# Altium PCB Buck Converter.PcbDoc
Units mil, origin at the board's own origin, x right, y up, seen from the top; angles counter-clockwise.
Board outline 2261.35 x 1643.57 mil, 4 copper layers (Top Layer, L2 - GND, L3 - POWER, Bottom Layer), stack 23.756 mil thick; 39 components, 21 nets, 106 pads, 117 vias.
Unrouted connection lines stored in the file: 7.
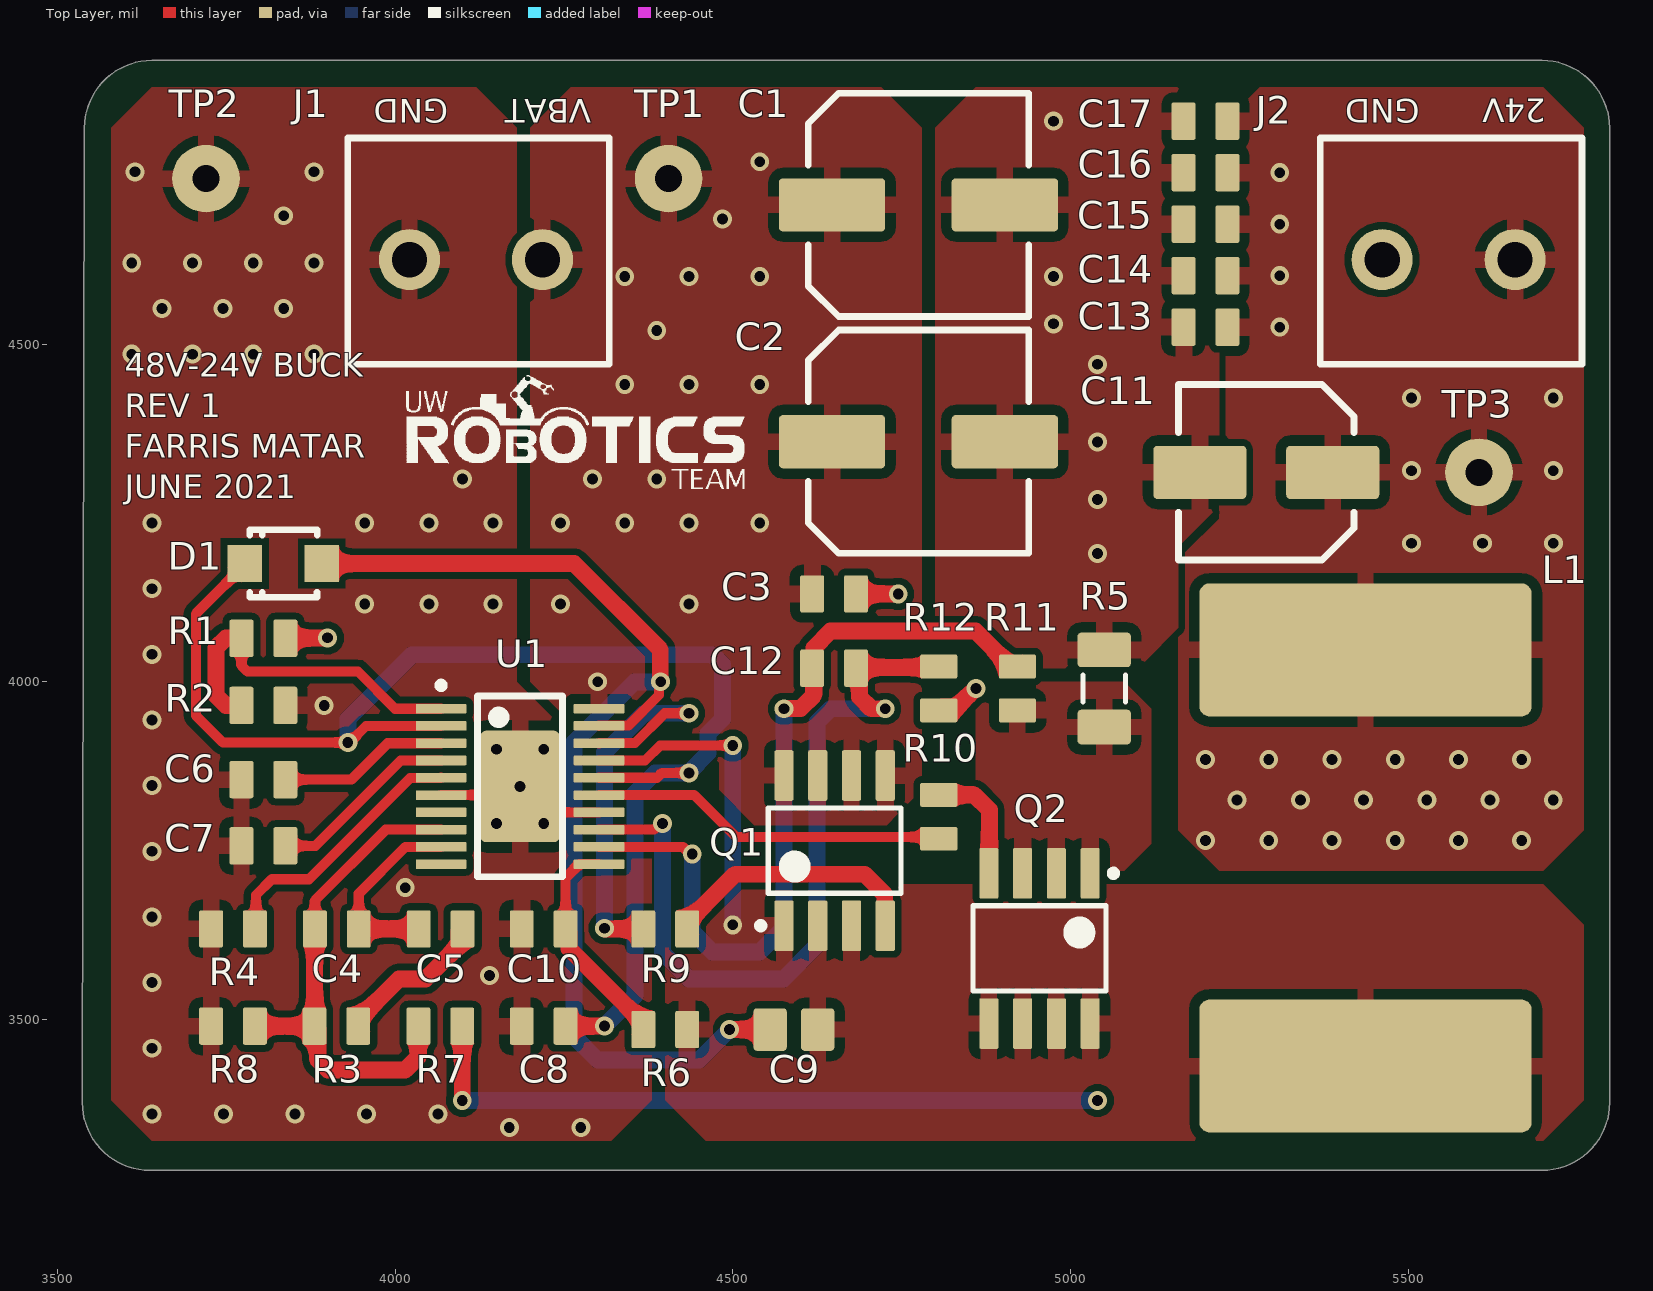
[diagram p0: Top Layer view]
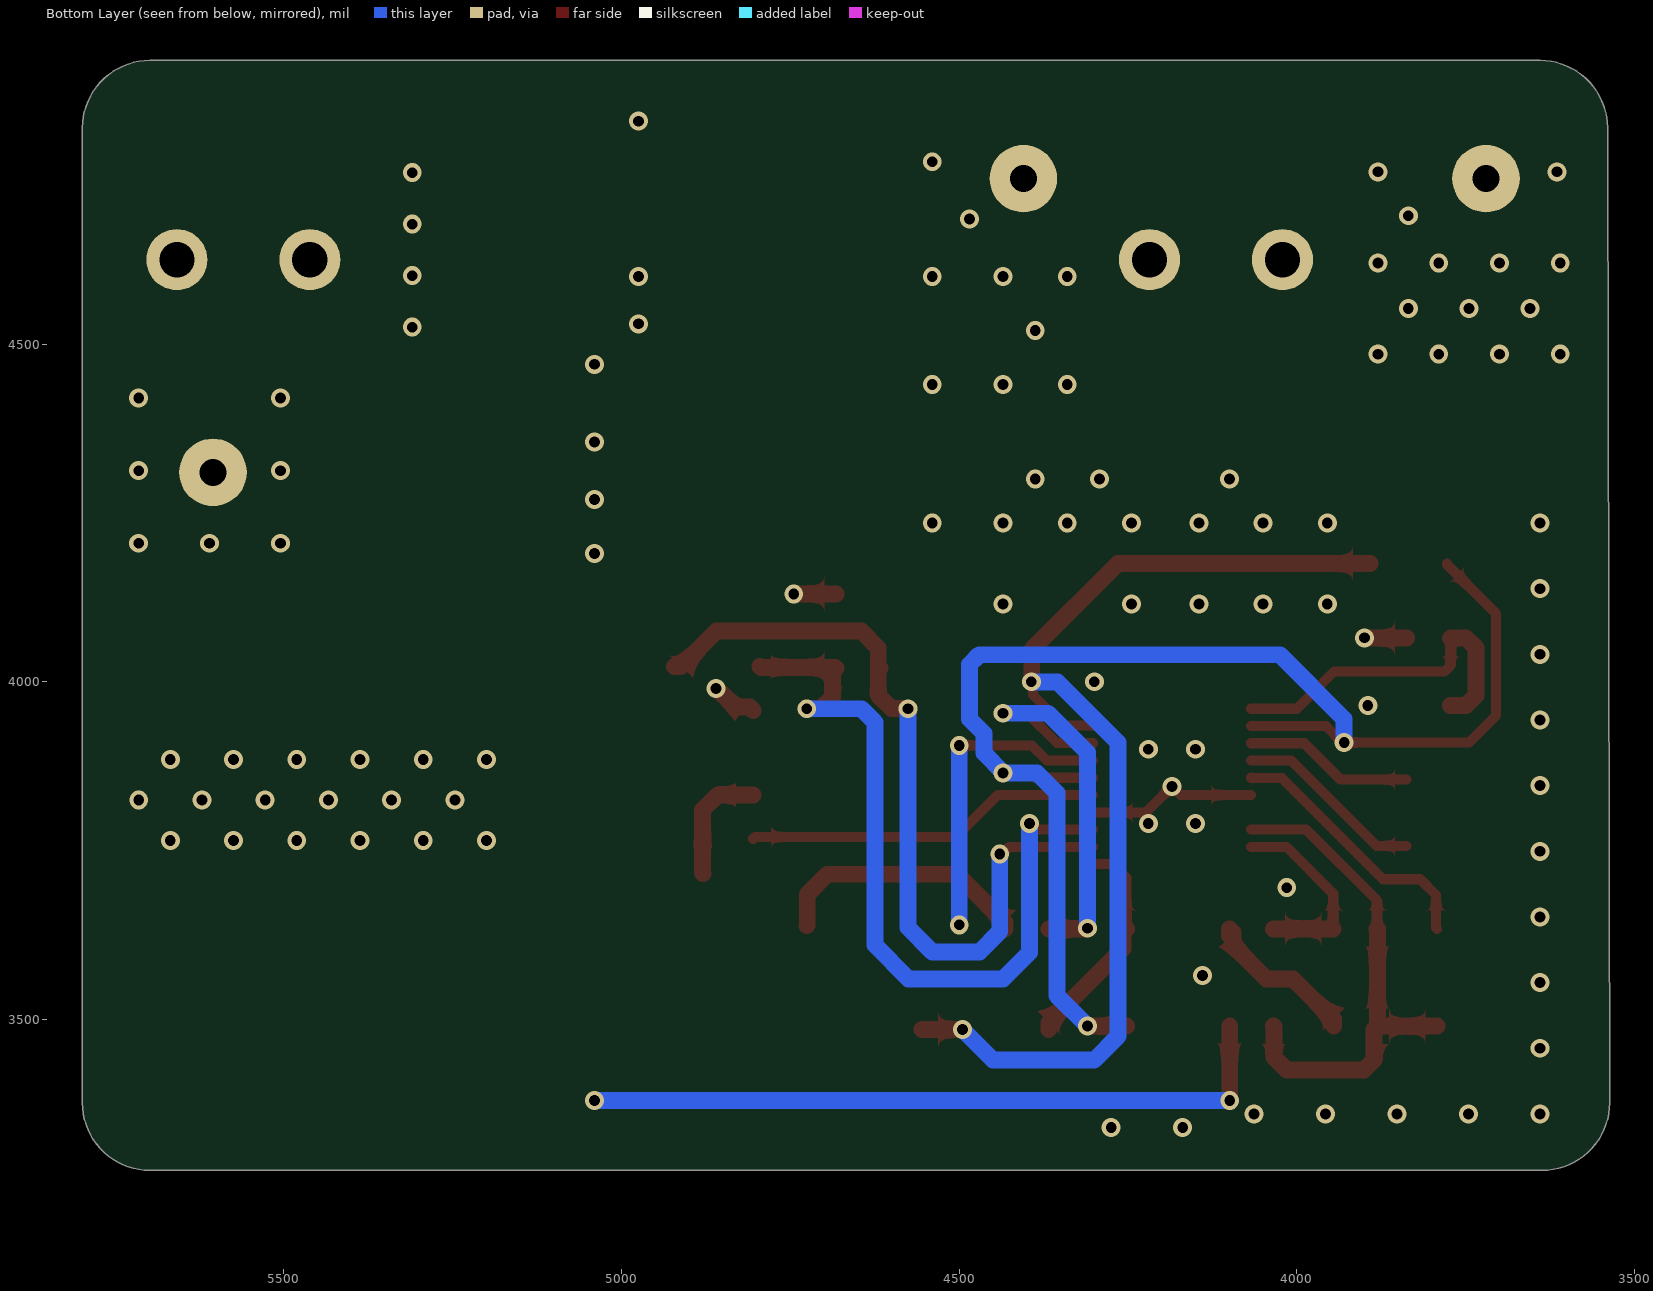
[diagram p1: Bottom Layer view, seen from below]
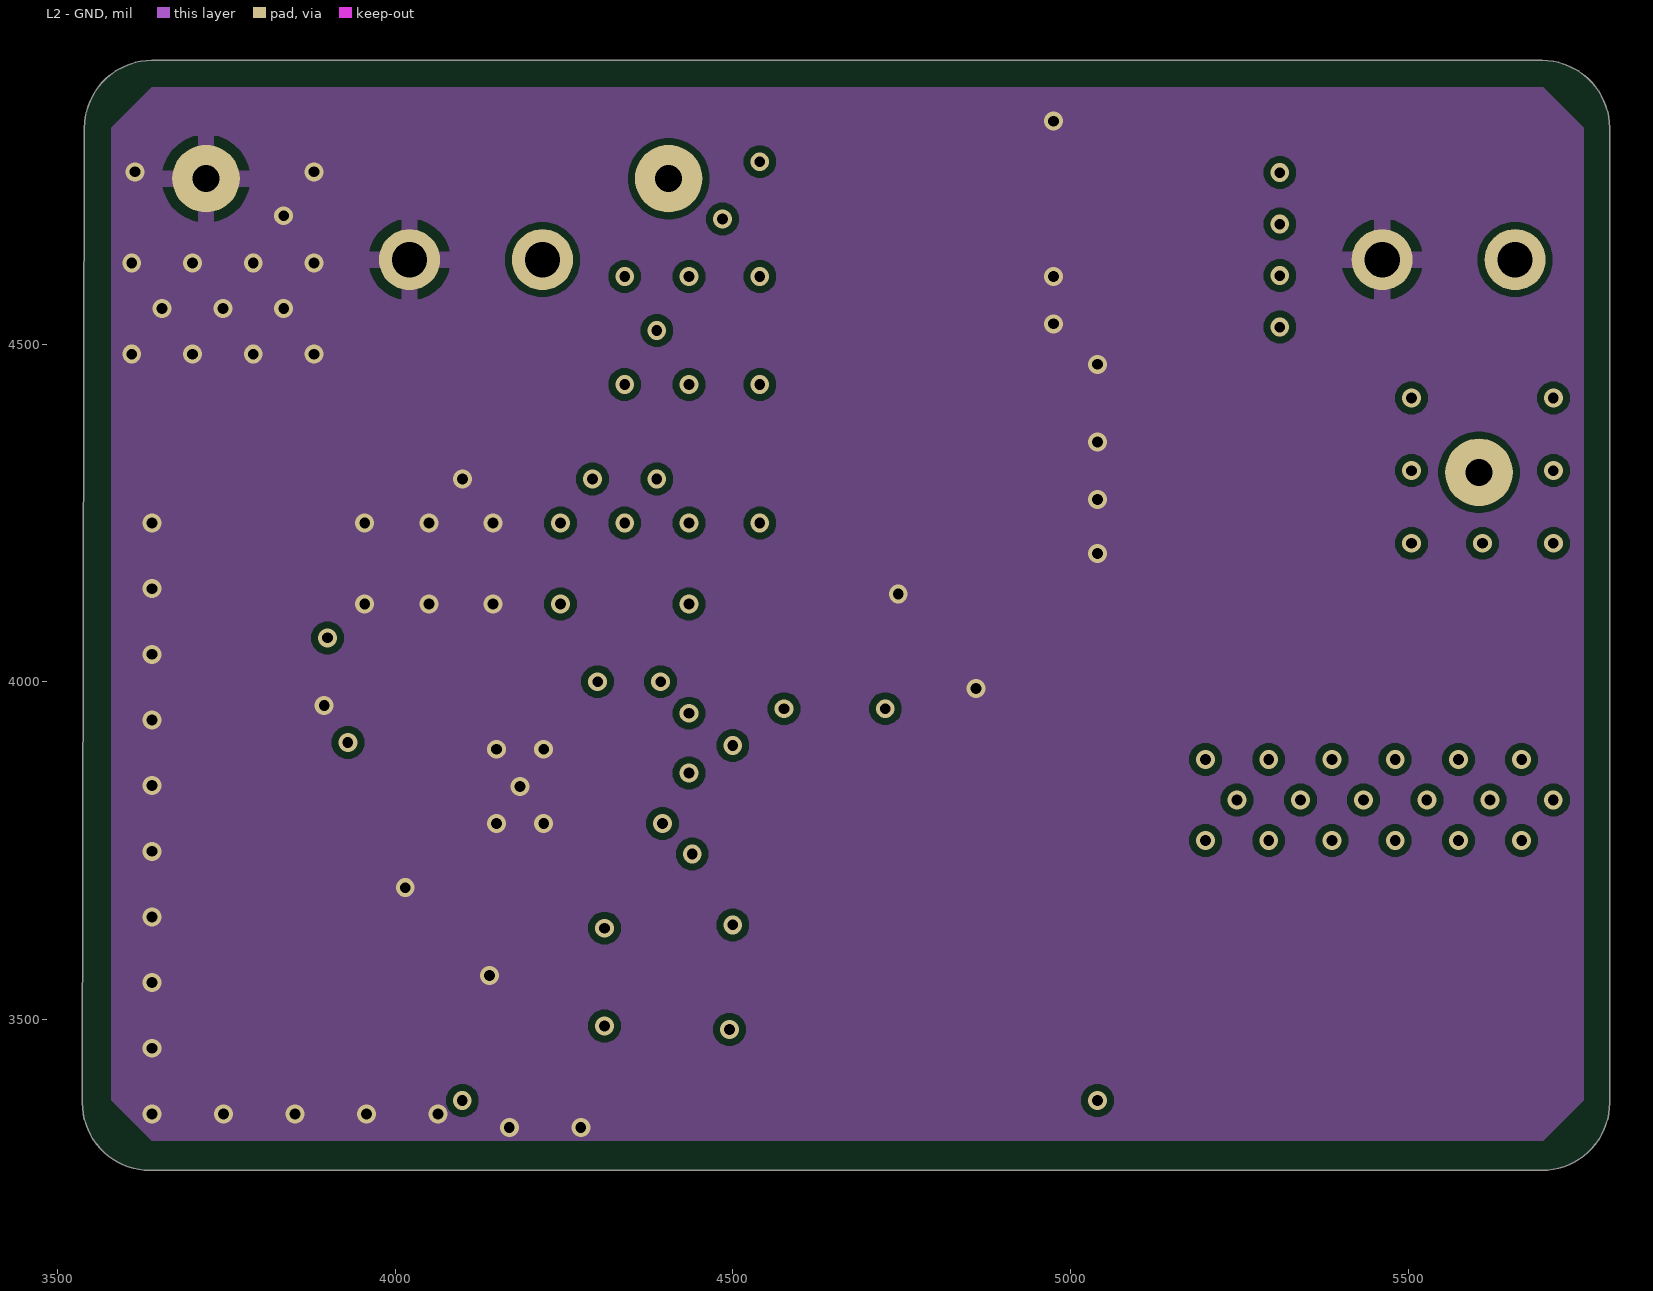
[diagram p2: L2 - GND]
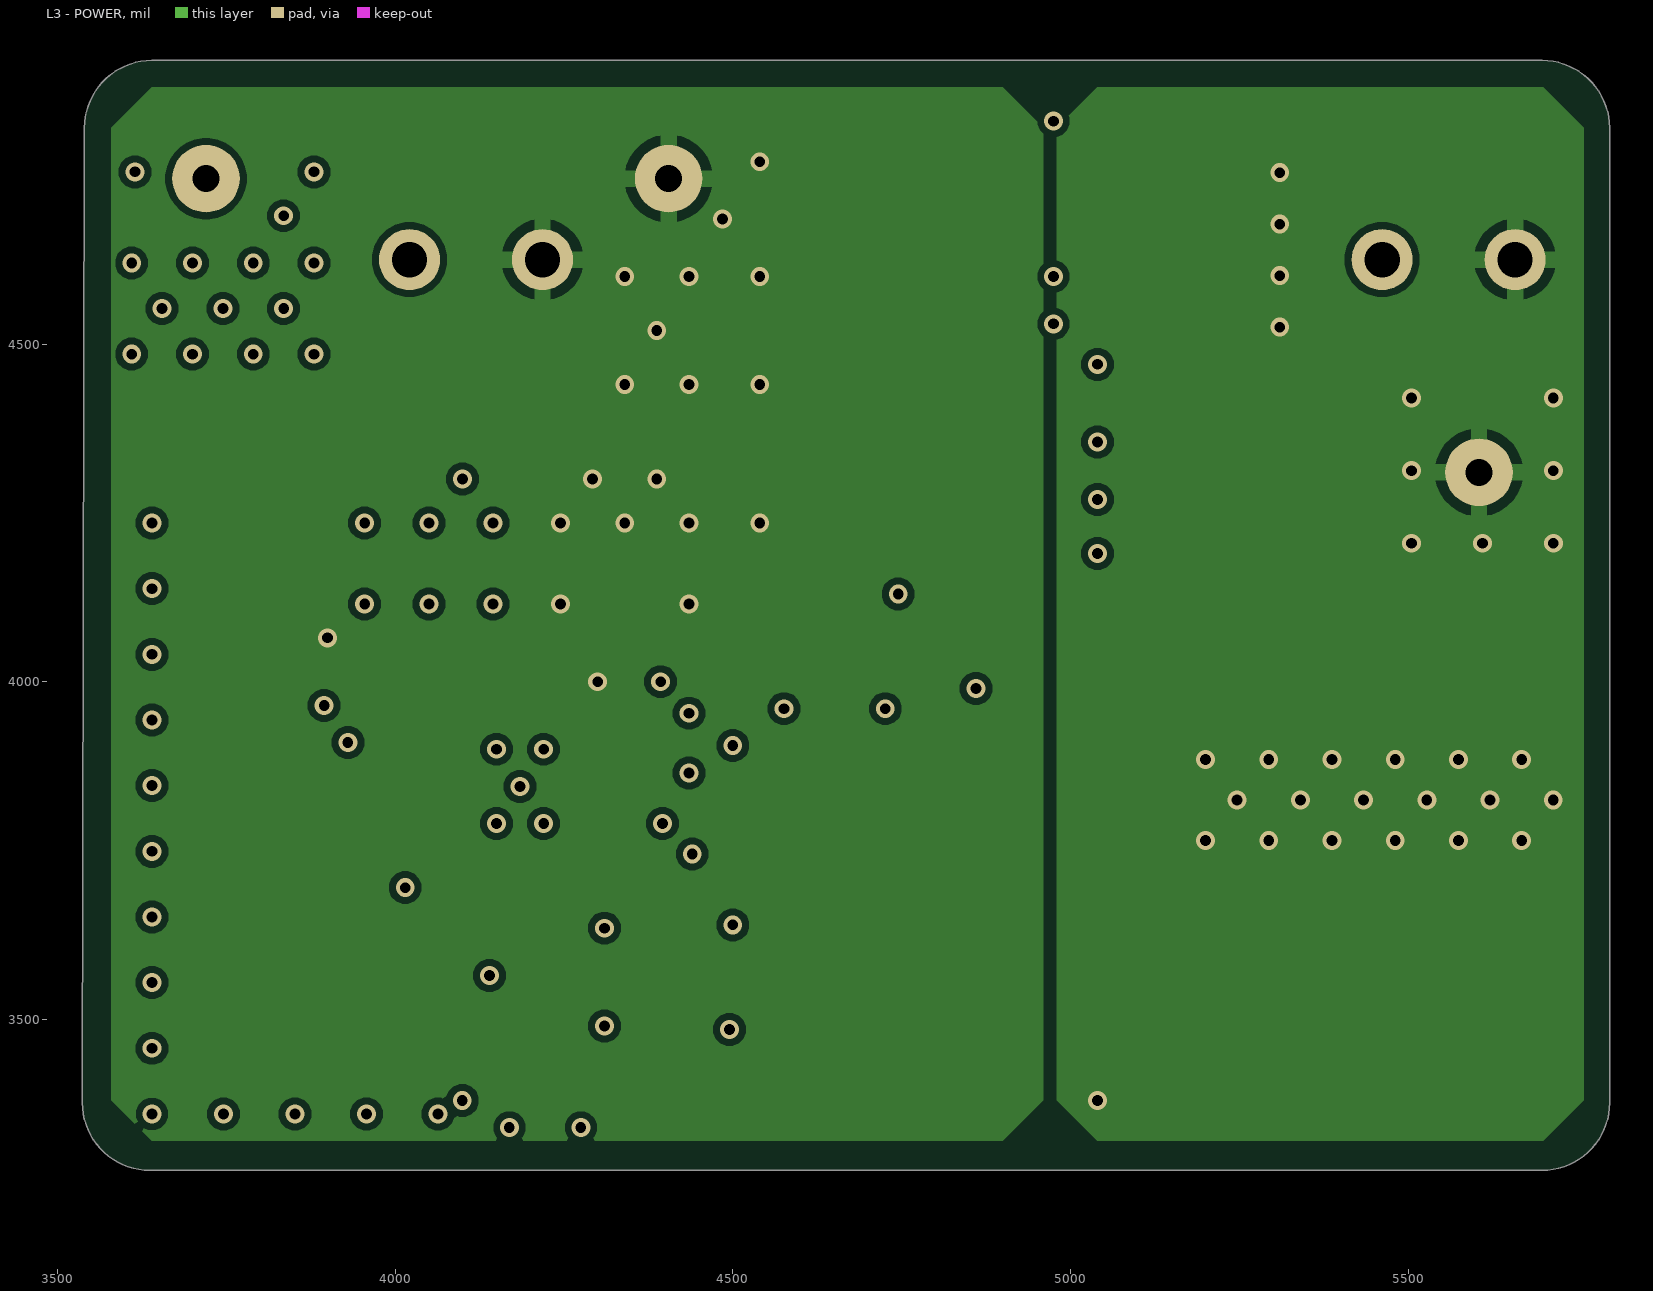
[diagram p3: L3 - POWER]
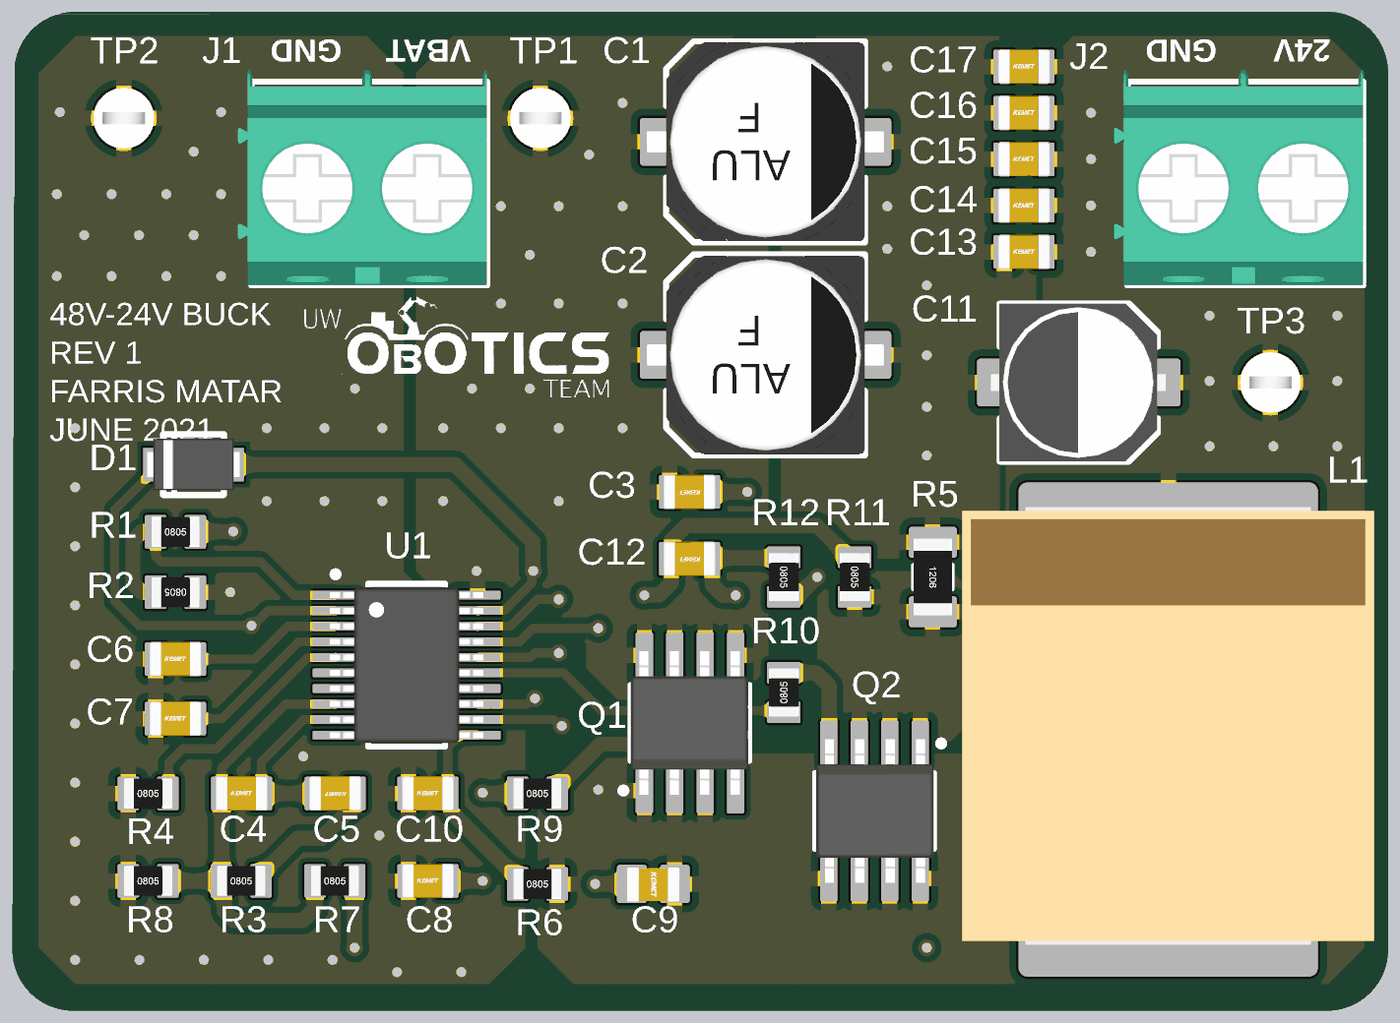
[diagram p4: 3D render of the assembled board from above, using the file's embedded part models]

## Layer stack, top to bottom
Top Solder: solder mask 0.4, Solder Resist, Dk 3.5
Top Layer: signal copper 1.4
Dielectric 2: prepreg 2.8, PP-006, Dk 4.1
L2 - GND: signal copper 1.378
Dielectric 1: dielectric 12.6, FR-4, Dk 4.8
L3 - POWER: signal copper 1.378
Dielectric 3: prepreg 2.8, PP-006, Dk 4.1
Bottom Layer: signal copper 1.4
Bottom Solder: solder mask 0.4, Solder Resist, Dk 3.5

## Board outline
3537,3376.43 ccw(c3637,3376.43) 3637,3276.43 3820.01,3276.43 5698.35,3276.43 ccw(c5698.35,3376.43) 5798.35,3376.43 5798.35,4820 ccw(c5698.35,4820) 5698.35,4920 3640,4920 ccw(c3640,4820) 3540,4820 3540,4800

## Design rules (kind name [scope] priority, off if disabled: settings)
Clearance [All] p1: gap=10 ignorepadtopadclearanceinfootprint=FALSE except(0: Arc-Hole Track-Hole SMDPad-Hole THPad-Hole Via-Hole Fill-Hole Poly-Hole Region-Hole Text-Hole)
PolygonConnect [All] p1: thpad.connectstyle=Relief thpad.reliefconductorwidth=25 thpad.reliefentries=4 thpad.polygonreliefangle="90 Angle" thpad.airgapwidth=15 smdpad.connectstyle=Relief smdpad.reliefconductorwidth=25 smdpad.reliefentries=4 smdpad.polygonreliefangle="90 Angle" smdpad.airgapwidth=15 via.connectstyle=Direct via.reliefconductorwidth=10 via.reliefentries=4 via.polygonreliefangle="90 Angle" via.airgapwidth=10
RoomDefinition "Buck Converter" [InComponentClass('Buck Converter')] p1: confinementstyle=ConfineIn formatcopy=TRUE lockcomponents=FALSE outline 2930,2010 5960,2010 5960,5000 2930,5000
RoutingVias [All] p1: holewidth=28 width=50 viastyle="Through Hole" minholewidth=28 minwidth=50 maxholewidth=28 maxwidth=50
SolderMaskExpansion [All] p1: expansion=4 istentingtop=FALSE
Width [All] p1: maxlimit=50 minlimit=10 preferedwidth=10 midlayer1_maxwidth=10 midlayer2_maxwidth=10 minimp=50.000000 maximp=50.000000 favimp=50.000000
30 further rules are at their usual default settings.

## Components (designator, comment, footprint, x,y, rotation, side; value= is the part's Value field where it differs from the comment)
C1 "CAP_22uF_80V_ALUM" RADIAL_PANASONIC_F 4775,4706.14 r270 top value=22µF
C2 "CAP_22uF_80V_ALUM" RADIAL_PANASONIC_F 4775,4355.42 r270 top value=22µF
C3 "CAP_0.1uF_100V_0805" CAP0805 4650,4130 r180 top value=0.1µF
C4 "CAP_150pF_16V_0805" CAP0805 3913.75,3634 r0 top value=150pF
C5 "CAP_330pF_50V_0805" CAP0805 4067.5,3634 r180 top value=330pF
C6 "CAP_0.47uF_25V_0805" CAP0805 3805,3855 r0 top value=0.47µF
C7 "CAP_0.015uF_50V_0805" CAP0805 3805,3757 r0 top value=0.015µF
C8 "CAP_0.47uF_25V_0805" CAP0805 4220,3490 r0 top value=0.47µF
C9 "CAP_0.22uF_100V_0805" CAP2012 4590.58,3485 r180 top value=0.22μF
C10 "CAP_820pF_50V_0805" CAP0805 4220,3634 r0 top value=820pF
C11 "CAP_100uF_35V_ALUM" RADIAL_CORNELL_D 5290,4310.01 r90 top value=100µF
C12 "CAP_NU_0805" CAP0805 4650,4020 r180 top value=NU
C13 "CAP_NU_0805" CAP0805 5200,4525 r0 top value=NU
C14 "CAP_NU_0805" CAP0805 5200,4601.25 r0 top value=NU
C15 "CAP_NU_0805" CAP0805 5200,4677.5 r0 top value=NU
C16 "CAP_NU_0805" CAP0805 5200,4753.75 r0 top value=NU
C17 "CAP_NU_0805" CAP0805 5200,4830 r0 top value=NU
D1 "DIO_SCHOTTKY_100V_150mA" SOD-123_FLAT 3834.61,4175 r0 top
J1 "CON_2POS_SCREW_TERM" 1935161 4119.8,4625 r180 top
J2 "CON_2POS_SCREW_TERM" 1935161 5560,4625 r180 top
L1 "IND_33uH_12.0A" IND_PULSE_PA4344 5436.98,3745 r270 top
Q1 "NMOS_100V_10.3A" 8-SOIC_NMOS 4650,3750 r90 top
Q2 "NMOS_100V_10.3A" 8-SOIC_NMOS 4955,3605 r270 top
R1 "RES_54.9kΩ_0805_1%" RES0805 3805,4064.34 r0 top value=54.9kΩ
R2 "RES_2.32kΩ_0805_1%" RES0805 3805,3965 r180 top value=2.32kΩ
R3 "RES_133kΩ_0805_1%" RES0805 3913.01,3490 r0 top value=133kΩ
R4 "RES_12.1kΩ_0805_1%" RES0805 3760,3634 r0 top value=12.1kΩ
R5 "RES_0.015Ω_1206_1%" RES1206 5050,3990 r270 top value=0.015Ω
R6 "RES_267kΩ_0805_1%" RES0805 4400,3485 r0 top value=267kΩ
R7 "RES_34.8kΩ_0805_1%" RES0805 4067.01,3490 r0 top value=34.8kΩ
R8 "RES_1.2kΩ_0805" RES0805 3760,3490 r0 top value=1.2kΩ
R9 "RES_0Ω_0805" RES0805 4400,3634 r0 top value=0Ω
R10 "RES_0Ω_0805" RES0805 4805,3800 r90 top value=0Ω
R11 "RES_0Ω_0805" RES0805 4921.59,3990 r270 top value=0Ω
R12 "RES_0Ω_0805" RES0805 4805,3990 r270 top value=0Ω
TP1 "TESTPOINT_LOOP" TESTPOINT_LOOP 4405,4745 r0 top
TP2 "TESTPOINT_LOOP" TESTPOINT_LOOP 3720,4745 r0 top
TP3 "TESTPOINT_LOOP" TESTPOINT_LOOP 5605,4310 r0 top
U1 "BUCK_LM5117PWP" HTSSOP 4185,3845 r0 top

## Footprints (in the part's own frame and the unit in brackets; to place one, negate y for a bottom-side part, rotate by r counter-clockwise, add the part's x,y. Pads: shape width x height; smd on the part's side, far side on the other; paste and mask are expansions set on the pad)
8-SOIC_NMOS [mm]
  rrect15% 1.9x0.72 smd: 1(-2.827,-1.926) 2(-2.827,-0.656) 2(-2.827,0.614) 2(-2.827,1.884) 3(2.823,-1.926) 3(2.823,-0.656) 3(2.823,0.614) 3(2.823,1.884)
  silkscreen extent -2.95,-2.52 1.6,2.88, body extent -3,-2.45 3,2.45, height 1.63
1935161 [mm] "TERM BLK 2POS SIDE ENTRY 5MM PCB"
  round 2.3 hole 1.325: 1(-2.5,0) 2(2.5,0)
  silkscreen extent -5.01,-4.57 4.83,3.94, body extent -5.01,-5.06 5.39,3.94, height 11.41
CAP0805 [mm] "Chip Capacitor, Body 2.0x1.2mm, Height 0.45mm, IPC Medium Density"
  rrect15% 0.9x1.4 smd: 1(-0.825,0) 2(0.825,0)
  body extent -1.1,-0.73 1.1,0.73, height 1.39
CAP2012 [mm]
  rrect20% 1.25x1.6 smd: 1(-0.895,0) 2(0.895,0)
  body extent -1.1,-0.7 1.1,0.75, height 1.41
HTSSOP [mm]
  rrect15% 1.9x0.36 smd: 1(-2.97,2.925) 2(-2.97,2.275) 3(-2.97,1.625) 4(-2.97,0.975) 5(-2.97,0.325) 6(-2.97,-0.325) 7(-2.97,-0.975) 8(-2.97,-1.625) 9(-2.97,-2.275) 10(-2.97,-2.925) 11(2.97,-2.925) 12(2.97,-2.275) 13(2.97,-1.625) 14(2.97,-0.975) 15(2.97,-0.325) 16(2.97,0.325) 17(2.97,0.975) 18(2.97,1.625) 19(2.97,2.275) 20(2.97,2.925)
  rrect15% 3x4.2 smd: 21(0,0)
  silkscreen extent -3.09,-3.4 1.6,3.92, body extent -3.2,-3.25 3.2,3.25, height 1.1
IND_PULSE_PA4344 [mm]
  rrect15% 5x12.5 smd: 1(-7.675,0) 2(7.975,0)
  body extent -9.14,-8.6 9.14,8.6, height 7.06
RADIAL_CORNELL_D [mm] "Size D radial surface mount capacitor"
  rrect15% 2x3.5 smd: 1(0,-2.5) 2(0,2.5)
  silkscreen extent -3.3,-3.3 3.3,3.3, body extent -3.3,-3.62 3.3,3.67, height 5.9
RADIAL_PANASONIC_F [mm]
  rrect15% 2x4 smd: 1(0,-3.25) 2(0,3.25)
  silkscreen extent -4.2,-4.15 4.2,4.15, body extent -4.15,-4.95 4.15,4.95, height 10.2
RES0805 [mm] "Chip Resistor, 2-Leads, Body 2.00x1.25mm, IPC High Density"
  rrect15% 0.9x1.4 smd: 1(-0.825,0) 2(0.825,0)
  body extent -1,-0.62 1,0.63, height 0.61
RES1206 [mm] "Chip Resistor, Body 3.2x1.6mm, IPC Medium Density"
  rrect20% 1.3x2 smd: 1(-1.45,0) 2(1.45,0)
  silkscreen extent -0.5,-0.8 0.5,0.8, body extent -1.6,-0.8 1.6,0.8, height 0.61
SOD-123_FLAT [mm]
  rect 1.3x1.4 smd: 1(-1.45,0) 2(1.45,0)
  silkscreen extent -1.27,-1.27 1.27,1.27, body extent -1.93,-1.08 1.92,1.08, height 1.35
TESTPOINT_LOOP [mm]
  round 2.54 hole 1.02: 1(0,0)
  body extent -1.27,-1.27 1.27,1.27, height 4.57

## Part data
C1 C2: "CAP ALUM POLY 22UF 20% 80V SMD", Manufacturer 1="Panasonic Electronic Components", Manufacturer Part Number 1=EEH-ZA1K220P, Package/Footprint=SMD, Supplier Part Number 1=P122641CT-ND, Voltage Rating=80V, Mounting Type=SMD, Supplier 1=Digi-Key
C3: "CAP CER 0.1UF 100V X7R 0805", Manufacturer 1="TDK Corporation", Manufacturer Part Number 1=C2012X7R2A104K125AA, Package/Footprint=0805, Supplier Part Number 1=445-1418-1-ND, Voltage Rating=100V, Supplier 1=Digi-Key
C4: "CAP CER 150PF 16V X7R 0805", Manufacturer 1="Würth Elektronik", Manufacturer Part Number 1=885012207028, Package/Footprint=0805, Supplier Part Number 1=732-8028-1-ND, Voltage Rating=16V, Supplier 1=Digi-Key
C5: "CAP CER 330PF 50V C0G/NPO 0805", Manufacturer 1=Yageo, Manufacturer Part Number 1=CC0805JRNPO9BN331, Package/Footprint=0805, Supplier Part Number 1=311-1117-1-ND, Voltage Rating=50V, Supplier 1=Digi-Key
C6 C8: "CAP CER 0.47UF 25V X5R 0805", Manufacturer 1=KEMET, Manufacturer Part Number 1=C0805C474K3PAC7800, Package/Footprint=0805, Supplier Part Number 1=399-15508-1-ND, Voltage Rating=25V, Supplier 1=Digi-Key
C7: "CAP CER 0.015UF 50V C0G 0805", Manufacturer 1="TDK Corporation", Manufacturer Part Number 1=CGA4F2C0G1H153J085AA, Package/Footprint=0805, Supplier Part Number 1=445-6948-1-ND, Voltage Rating=50V, Supplier 1=Digi-Key
C9: "CAP CER 0.22UF 100V X7R 0805", Dielectric=X7R, Manufacturer 1="Taiyo Yuden", Manufacturer Part Number 1=HMJ212BB7224KGHT, Package/Footprint=0805, Supplier Part Number 1=587-4221-1-ND, Voltage Rating=100V, Mounting Type=SMD, Supplier 1=Digi-Key
C10: "CAP CER 820PF 50V C0G/NP0 0805", Manufacturer 1=KEMET, Manufacturer Part Number 1=C0805X821J5GAC7800, Package/Footprint=0805, Supplier Part Number 1=399-19481-1-ND, Voltage Rating=50V, Supplier 1=Digi-Key
C11: "CAP ALUM 100UF 20% 35V SMD", Manufacturer 1=Rubycon, Manufacturer Part Number 1=35TKV100M8X10.5, Package/Footprint=SMD, Supplier Part Number 1=1189-2074-1-ND, Voltage Rating=35V, Mounting Type=SMD, Supplier 1=Digi-Key
C12 C13 C14 C15 C16 C17: "PLACEHOLDER CAPACITOR 0805", Package/Footprint=0805, Mounting Type=SMD
D1: "DIODE SCHOTTKY 100V 150MA SOD123", Manufacturer 1="Comchip Technology", Manufacturer Part Number 1=CDBW46-G, Package/Footprint=SOD-123, Supplier Part Number 1=641-1964-1-ND, Mounting Type=SMD, Supplier 1=Digi-Key, Vr (Max)=100V
J1 J2: "TERM BLK 2POS SIDE ENTRY 5MM", Manufacturer 1="Phoenix Contact", Manufacturer Part Number 1=1935161, Package/Footprint=SMD, Supplier Part Number 1=277-1667-ND, Mounting Type=TH, Supplier 1=Digi-Key
L1: "FIXED IND 33UH 12A 37 MOHM SMD", Current Rating=12A, DC Resistance (DCR)=37mR, Inductance=33μH, Inductance Tolerance=20%, Manufacturer 1="Pulse Electronics Power", Manufacturer Part Number 1=PA4344.333ANLT, Supplier Part Number 1=553-4036-1-ND, Test Frequency=100kHz, Mounting Type=SMD, Saturation Current=12A, Supplier 1=Digi-Key
Q1 Q2: "MOSFET N-CH 100V 10.3A 8SOIC", Manufacturer 1="Vishay Siliconix", Manufacturer Part Number 1=SI4058DY-T1-GE3, Package/Footprint=8-SOIC, Supplier Part Number 1=SI4058DY-T1-GE3CT-ND, Id=10.3A, Supplier 1=Digi-Key, Vdss=100V, Vgs (Max)=±20V
R1: "RES SMD 54.9K OHM 1% 1/8W 0805", Manufacturer 1="Vishay Dale", Manufacturer Part Number 1=CRCW080554K9FKEA, Package/Footprint=0805, Supplier Part Number 1=541-54.9KCCT-ND, Supplier 1=Digi-Key
R2: "RES 2.32K OHM 1% 1/4W 0805", Manufacturer 1="Stackpole Electronics Inc", Manufacturer Part Number 1=RNCP0805FTD2K32, Package/Footprint=0805, Supplier Part Number 1=RNCP0805FTD2K32CT-ND, Supplier 1=Digi-Key
R3: "RES SMD 133K OHM 1% 1/8W 0805", Manufacturer 1=Yageo, Manufacturer Part Number 1=RC0805FR-07133KL, Package/Footprint=0805, Supplier Part Number 1=311-133KCRCT-ND, Supplier 1=Digi-Key
R4: "RES 12.1K OHM 1% 1/4W 0805", Manufacturer 1="Stackpole Electronics Inc", Manufacturer Part Number 1=RNCP0805FTD12K1, Package/Footprint=0805, Supplier Part Number 1=RNCP0805FTD12K1CT-ND, Supplier 1=Digi-Key
R5: "RES 0.015 OHM 1% 1/2W 1206", Manufacturer 1="Rohm Semiconductor", Manufacturer Part Number 1=UCR18EVHFSR015, Package/Footprint=1206, Supplier Part Number 1=RHM1305CT-ND, Supplier 1=Digi-Key
R6: "RES SMD 267K OHM 1% 1/8W 0805", Manufacturer 1=Yageo, Manufacturer Part Number 1=RC0603FR-071K2L, Package/Footprint=0805, Supplier Part Number 1=311-267KCRCT-ND, Supplier 1=Digi-Key
R7: "RES 34.8K OHM 1% 1/8W 0805", Manufacturer 1="Stackpole Electronics Inc", Manufacturer Part Number 1=RMCF0805FT34K8, Package/Footprint=0805, Supplier Part Number 1=RMCF0805FT34K8CT-ND, Supplier 1=Digi-Key
R8: library part RES_1.2kΩ_0805_1%, "RES SMD 1.2K OHM 1% 1/8W 0805", Manufacturer 1="Samsung Electro-Mechanics", Manufacturer Part Number 1=RC2012F122CS, Package/Footprint=0805, Supplier Part Number 1=1276-5275-2-ND, Supplier 1=Digi-Key
R9 R10 R11 R12: "RES 0 OHM JUMPER 1/8W 0805", LCSC Part #=C17477, Manufacturer 1="Panasonic Electronic Components", Manufacturer Part Number 1=ERJ-6GEY0R00V, Package/Footprint=0805, Supplier Part Number 1=P0.0ACT-ND, Mounting Type=SMD, Supplier 1=Digi-Key
TP1 TP2 TP3: "TESTPOINT THRUHOLE", Manufacturer 1="Keystone Electronics", Manufacturer Part Number 1=5002, Package/Footprint=TH, Supplier Part Number 1=36-5002-ND, Mounting Type=TH, Supplier 1=Digi-Key
U1: "IC REG CTRLR BUCK 20TSSOP", Manufacturer 1="Texas Instruments", Manufacturer Part Number 1=LM5117PMH/NOPB, Package/Footprint=20-HTSSOP, Supplier Part Number 1=296-41310-1-ND, Mounting Type=SMD, Supplier 1=Digi-Key

## Via types
v1: diameter 28, hole 16, Top Layer to Bottom Layer, tented both sides, 117 vias

## Nets (pads, with @x,y where several pads share a name; then routed paths per layer and width w, separated by ;. In a path a pad name is that pad's centre, name@x,y a point inside that pad or via, vN(x,y) a via of type N, cw(c..) or ccw(c..) an arc to the next point about the centre after c; other vN are vias at no path point)
24V: C11.1 C13.2 C14.2 C15.2 C16.2 C17.2 J2.1 L1.1 R7.2 TP3.1 | length 1050.5
  Top Layer w25: v1(4099.49,3380) R7.2
  Bottom Layer w25: v1(4099.49,3380) v1(5040,3380)
  other v1: 5200,3765 5293.64,3765 5387.27,3765 5480.91,3765 5574.54,3765 5668.18,3765 5246.82,3825 5340.45,3825 5434.09,3825 5527.73,3825 5621.36,3825 5715,3825 5200,3885 5293.64,3885 5387.27,3885 5480.91,3885 5574.54,3885 5668.18,3885 5505,4205 5610,4205 5715,4205 5505,4312.5 5715,4312.5 5505,4420 5715,4420 5310,4525 5310,4601.25 5310,4677.5 5310,4753.75
GND: C1.2 C2.2 C3.1 C6.1 C7.1 C8.1 C10.1 C11.2 C13.1 C14.1 C15.1 C16.1 C17.1 J1.2 J2.2 R2.1 R4.1 R5.1 R8.1 R12.2 TP2.1 U1.6 U1.14 U1.21 | length 386
  Top Layer w15: U1.6 4172.2,3832.2 v1(4185,3845) 4223.39,3806.61 U1.14
  Top Layer w25: C3.1 v1(4745,4130) ; R12.2 4810.22,3962.74 4831.92,3962.74 4859.19,3990 v1(4860,3990)
  other v1: 4169.17,3340 4275,3340 3640,3360 3745.83,3360 3851.67,3360 3957.5,3360 4063.33,3360 3640,3457.22 3640,3554.44 4140,3565 3640,3651.67 4015,3695 3640,3748.89 4150,3790 4220,3790 3640,3846.11 4150,3900 4220,3900 3640,3943.33 3895,3965 3640,4040.56 3955,4115 4050,4115 4145,4115 3640,4137.78 5040,4190 3640,4235 3955,4235 4050,4235 4145,4235 5040,4270 4100,4300 5040,4355 5040,4470 3610,4485 3700,4485 3790,4485 3880,4485 4975,4530 3655,4552.5 3745,4552.5 3835,4552.5 4975,4600 3610,4620 3700,4620 3790,4620 3880,4620 3835,4690 3615,4755 3880,4755 4975,4830
NetC4_1: C4.1 R3.1 R7.1 R8.2 U1.8 | length 765.7
  Top Layer w15: C4.1 3881.27,3676.27 3986.02,3781.02 U1.8
  Top Layer w25: R8.2 R3.1 ; C4.1 3880.9,3633.63 3880.9,3490.37 R3.1 ; R7.1 4033.89,3489.36 4033.89,3443.89 4015,3425 3900.39,3425 3885.75,3439.64 3885.75,3484.78 R3.1
NetC4_2: C4.2 C5.2 U1.9 | length 291.5
  Top Layer w15: C4.2 3946.23,3686.23 4015.43,3755.43 U1.9
  Top Layer w25: C4.2 C5.2
NetC5_1: C5.1 R3.2 | length 240.9
  Top Layer w25: R3.2 3945.49,3499.84 4005.65,3560 4045,3560 4094.76,3609.76 4094.76,3628.78 C5.1 C5.1@4099.98,3624.16
NetC6_2: C6.2 U1.3 | length 252.9
  Top Layer w15: C6.2 3935,3855 3988.98,3908.98 U1.3
NetC7_2: C7.2 U1.4 | length 282.9
  Top Layer w15: C7.2 3882,3757 4008.39,3883.39 U1.4
NetC8_2: C8.2 D1.1 U1.2 U1.16 | length 2116
  Top Layer w15: D1.1 3777.52,4173.03 3705,4100.51 3705,3950 3745,3910 v1(3930,3910) 3932.48,3910 3957.05,3934.57 U1.2 ; U1.16 4387.8,3857.8 4395,3865 v1(4435,3865) v1@4440,3865
  Top Layer w25: C8.2 v1(4310,3490)
  Bottom Layer w25: v1(3930,3910) 3930,3945 4025,4040 4470.36,4040 4485,4025.36 4485,3945 4463.5,3923.5 4463.5,3894.31 4435,3865.81 v1(4435,3865) 4385,3865 4355,3835 4355,3535 v1(4310,3490)
NetC9_1: C9.1 L1.2 Q1.2 Q2.3 R6.2 U1.17 | length 473
  Top Layer w15: U1.17 4370.16,3883.39 4392.46,3905.69 v1(4500,3905.69)
  Bottom Layer w25: v1(4500,3640) v1(4500,3905.69)
NetC9_2: C9.2 D1.2 U1.19 | length 1654
  Top Layer w15: U1.19 4302.34,3934.98 4345.37,3934.98 4390.8,3980.41 4390.8,3997.51 v1(4393.28,4000)
  Top Layer w25: D1.2 4265,4175 4392.71,4047.29 4392.71,4000.57 v1(4393.28,4000) ; v1(4495,3485) C9.2
  Bottom Layer w25: v1(4393.28,4000) 4392.71,3999.43 4354.43,3999.43 4265,3910 4265,3475 4300,3440 4450,3440 v1(4495,3485)
NetC10_2: C10.2 R6.1 U1.11 | length 330.2
  Top Layer w15: C10.2 4252.48,3709.88 4272.44,3729.84 U1.11
  Top Layer w25: C10.2 4257.7,3628.78 4257.7,3604.67 4367.52,3494.84 R6.1
NetC12_1: C12.1 R12.1 U1.13 | length 1197.7
  Top Layer w15: U1.13 4383.35,3781.02 4392.46,3790.14 v1(4395.98,3790.14)
  Top Layer w25: v1(4725.82,3960) 4725.76,3959.95 4705.05,3959.95 4687.7,3977.3 4687.7,4014.78 C12.1 4683.72,4021.24 4793.76,4021.24 R12.1@4795,4022.48
  Bottom Layer w25: v1(4395.98,3790.14) 4395.98,3599.02 4435,3560 4575,3560 4625,3610 4625,3940 4645,3960 v1(4725.82,3960)
NetC12_2: C12.2 R11.1 U1.12 | length 1202.9
  Top Layer w15: U1.12 4426.05,3755.43 4436.48,3745 v1(4440,3745)
  Top Layer w25: v1(4575.82,3960) 4576.39,3960.57 4600.57,3960.57 4620,3980 4620,4017.52 C12.2 4620,4022.48 4620,4050 4645,4075 4859.23,4075 4911.75,4022.48 R11.1
  Bottom Layer w25: v1(4440,3745) 4440,3630 4470,3600 4540,3600 4575.82,3635.82 v1(4575.82,3960)
NetQ1_1: Q1.1 R9.2 | length 390.9
  Top Layer w25: R9.2 4432.48,3643.84 4503.64,3715 4695,3715 4725,3685 4725,3639.52 Q1.1
NetQ2_1: Q2.1 R10.2 | length 178.4
  Top Layer w25: R10.2 4857.52,3832.48 4880,3810 4880,3717.12 Q2.1
NetQ2_2: Q2.2 R5.2 R11.2
NetR1_1: R1.1 R2.2 U1.1 | length 520.7
  Top Layer w15: R1.1 3772.52,4023.79 3781.31,4015 3945,4015 4000,3960 4067.91,3960 U1.1
  Top Layer w25: R2.2 3749.64,3965 3735,3979.64 3735,4050.36 3749.64,4065 3771.86,4065 R1.1
NetR4_2: R4.2 U1.5 | length 396.7
  Top Layer w15: R4.2 3794.06,3635.58 3794.06,3684.06 3817.5,3707.5 3872.5,3707.5 4022.38,3857.38 4067.66,3857.38 U1.5
NetR9_1: R9.1 U1.18 | length 623.5
  Top Layer w15: U1.18 4302.34,3909.39 4355.13,3909.39 4399.07,3953.33 v1(4435,3953.33) v1@4440,3953.33
  Top Layer w25: v1(4310,3635) 4310.81,3635 4311.81,3634 R9.1
  Bottom Layer w25: v1(4310,3635) 4310,3895 4368.33,3953.33 v1(4435,3953.33)
NetR10_1: R10.1 U1.15 | length 529.9
  Top Layer w15: U1.15 4442.8,3832.2 4505,3770 4802.52,3770 R10.1
VBAT: C1.1 C2.1 C3.2 J1.1 Q1.3 R1.2 TP1.1 U1.20 | length 62.8
  Top Layer w25: R1.2 3837.81,4064.67 3899.67,4064.67 v1(3900,4065)
  other v1: 4300,4000 4245,4115 4435,4115 4245,4235 4340,4235 4435,4235 4540,4235 4292.5,4300 4387.5,4300 4340,4440 4435,4440 4540,4440 4387.5,4520 4340,4600 4435,4600 4540,4600 4485,4685 4540,4770
pads on no net: U1.7 U1.10

## Polygon pours and split planes (outlines as drawn)
GND on Top Layer "GND_L01_P08" (solid, pour order 16): 4120,4880 4180,4820 4180,4000 4260,3920 4320,3920 4380,3860 4380,3380 4320,3320 3640,3320 3580,3380 3580,4820 3640,4880
GND on Top Layer "GND_L01_P06" (solid, pour order 14): 4800,4820 4860,4880 5160,4880 5220,4820 5220,4260 5160,4200 5160,4080 5100,4020 4860,4020 4800,4080
VBAT on Top Layer "VBAT_L01_P03" (solid, pour order 13): 4200,4820 4260,4880 4720,4880 4780,4820 4780,3840 4720,3780 4540,3780 4480,3840 4480,3880 4420,3940 4260,3940 4200,4000
NetQ2_2 on Top Layer "RSENSE_L01_P02" (solid, pour order 10): 5120,3760 5080,3720 4900,3720 4860,3760 4860,3960 4900,4000 5080,4000 5120,3960
NetC9_1 on Top Layer "INPUT_LOOP_L01_P01" (solid, pour order 9): 5700,3320 5760,3380 5760,3640 5700,3700 4460,3700 4400,3640 4400,3380 4460,3320
24V on Top Layer "24V_L01_P07" (solid, pour order 15): 5280,4880 5700,4880 5760,4820 5760,3780 5700,3720 5220,3720 5160,3780 5160,4181.65 5220,4241.65 5220,4820
GND on L2 - GND "GND_L02_P04" (solid, pour order 5): 3580,4820 3640,4880 5700,4880 5760,4820 5760,3380 5700,3320 3640,3320 3580,3380
VBAT on L3 - POWER "VBAT_L03_P05" (solid, pour order 7): 3640,4880 4900,4880 4960,4820 4960,3380 4900,3320 3640,3320 3580,3380 3580,4820
24V on L3 - POWER "24V_L03_P10" (solid, pour order 17): 4980,4820 5040,4880 5700,4880 5760,4820 5760,3380 5700,3320 5040,3320 4980,3380

## Silkscreen, mask and mechanical layers (free items; w line width, h text height)
Top Overlay:
  drawing of 16 lines, arcs and shapes, not listed
  text "24V" at 5703.94,4875 h60 r180
  text "GND" at 4078.37,4874.28 h60 r180
  text "VBAT" at 4290.71,4874.28 h60 r180
  text "GND" at 5517,4874.28 h60 r180
  text "48V-24V BUCK / REV 1 / FARRIS MATAR / JUNE 2021" at 3600,4260 h60
Mechanical 1:
  lines w10: 3536.42,3376.43 3540,4800 3540,4820 cw(c3640,4820) 3640,4920 3820,4920 5698.35,4920 cw(c5698.35,4820) 5798.35,4820 5798.35,3376.43 cw(c5698.35,3376.43) 5698.35,3276.43 3820.01,3276.43 ; 3537,3376.43 ccw(c3637,3376.43) 3637,3276.43 3820.01,3276.43 ; 3820.01,3276.43 ccw(c3820.01,3276.43) 3820.01,3276.43